# EAGLE board 121_jinkan_5m (EAGLE 9.2.1)
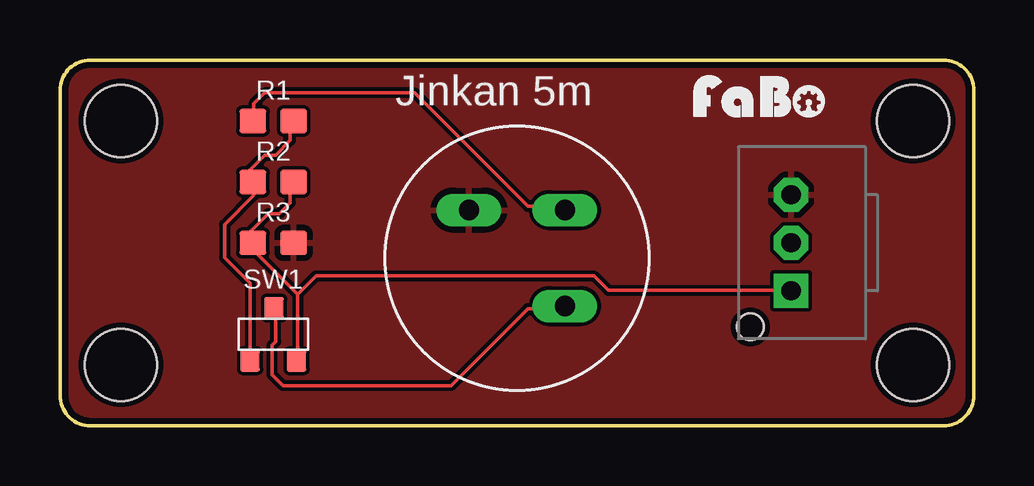
[diagram p0: board, top side]
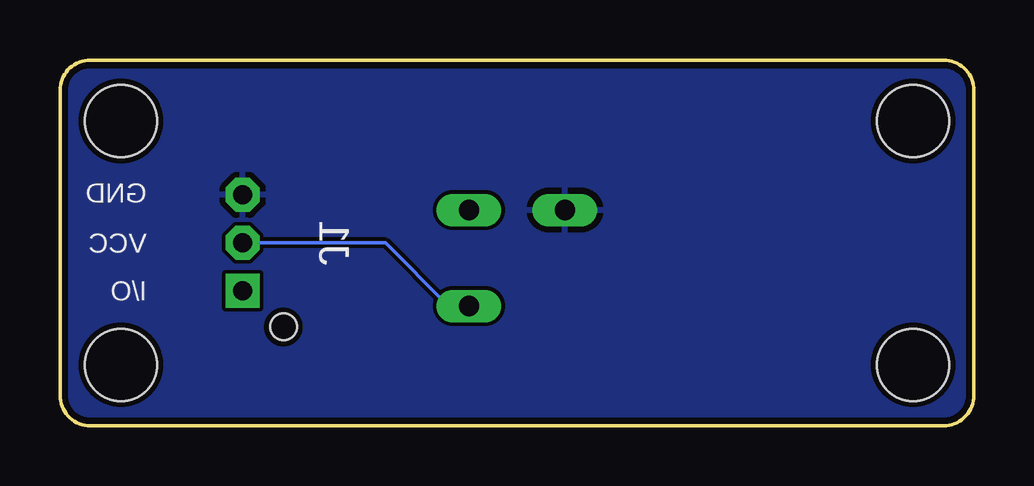
[diagram p1: board, bottom side, seen from below]

Size 38.1 x 15.24 mm. Coordinates in mm from the lower left corner, seen from the top.
Outline: 0,13.97 0,1.27 arc90 1.27,0 36.83,0 arc90 38.1,1.27 38.1,13.97 arc90 36.83,15.24 1.27,15.24 arc90 0,13.97
Copper layers (1*16): Top 0.035mm / dielectric 1.5mm / Bottom 0.035mm
Design rules "SeeedStudio_2layer_DRU_no_angle_20140221": minimum track width 6mil, minimum drill 12mil, track to track 6mil, track to pad 6mil, pad to pad 6mil, via to via 6mil, smd to smd 0mil, copper to edge 10mil, drill to drill 10mil, minimum pad ring 10mil, minimum via ring 6mil, stop-mask expansion 2mil, vias tented up to drill 100mil, thermal gap 10mil
Holes 3 mm at 2.54,12.7 2.54,2.54 35.56,2.54 35.56,12.7

## Footprints (pad centres in the part's own frame; a part is rotated, then mirrored left to right if it is on the bottom)
FABO_BRICK_3PIN_B03B-PASK-1_SILK_BOTTOM = drill 0.8 pad 1.422 octagon: GND 2,1.27; VCC 0,1.27 | drill 0.8 pad 1.422 square: I/O -2,1.27 | hole 1.1: -3.5,2.97
0603 = smd 1.1 x 1: 1 -0.85,0; 2 0.85,0
SOT23 = smd 0.8 x 0.9: 1 -0.97,-1.1; 2 0.97,-1.1; 3 0.03,1.1
EKMB = drill 0.85 long: GND -2,2; OUT 2,2; VDD 2,-2

## Placement (x,y rotation side)
J1  [FABO_BRICK_3PIN_B03B-PASK-1_SILK_BOTTOM]  31.75,7.62 90 top
R1  33K  [0603]  8.89,12.7 0 top
R2  10K  [0603]  8.89,10.16 0 top
R3  33K  [0603]  8.89,7.62 0 top
SW1  FAIRCHILD-FDN338  [SOT23]  8.89,3.81 0 top
U$2  [LOGO_FABO_S]  29.21,12.7 0 top
U$4  EKBM  [EKMB]  19.05,6.99 0 top

## Library data of the parts
J1 = FaBo-Template
R1-R3 = FaBo-Resistors
SW1 = FaBo-Parts
U$2 = FaBo-Logo
U$4 = FaBo-Sensor

## Nets
GND: J1.GND R3.2 U$4.GND
I/O: J1.I/O R2.2 R3.1 SW1.2
N$1: R1.1 U$4.OUT
N$2: R1.2 R2.1 SW1.1
VCC: J1.VCC SW1.3 U$4.VDD

## Tracks (layer width: path | path; a pad name or v marks a point on that pad's centre or on a via)
GND
  pour Bottom: 0,0 38.1,0 38.1,15.24 0,15.24
  pour Top: 0,0 38.1,0 38.1,15.24 0,15.24
I/O
  Top 0.152: 9.91,5.49 9.91,2.74 SW1.2 | 9.91,5.49 8.08,7.32 8.08,7.62 R3.1 7.92,7.62 7.92,8.08 8.69,8.84 9.14,8.84 9.6,9.3 9.6,10.06 R2.2 | 9.91,5.49 10.67,6.25 22.25,6.25 22.86,5.64 30.48,5.64 J1.I/O
N$1
  Top 0.152: R1.1 8.08,12.8 8.08,13.41 8.53,13.87 14.78,13.87 19.51,9.14 20.88,9.14 21.03,8.99 U$4.OUT
N$2
  Top 0.152: SW1.1 7.92,2.74 7.92,5.94 6.86,7.01 6.86,8.38 8.08,9.6 8.08,10.06 R2.1 7.92,10.21 7.92,10.67 8.53,11.28 8.99,11.28 9.6,11.89 9.6,12.65 R1.2
VCC
  Top 0.152: SW1.3 8.99,4.88 8.99,3.5 8.84,3.35 8.84,2.13 9.3,1.68 16.31,1.68 19.51,4.88 21.03,4.88 U$4.VDD
  Bottom 0.152: J1.VCC 24.54,7.62 21.95,5.03 21.18,5.03 U$4.VDD

## Text on the board
tPlace: Jinkan 5m